# Altium PCB LTC6268-diff-iso.PcbDoc
Units mm, origin at the board's own origin, x right, y up, seen from the top; angles counter-clockwise.
Board outline 152.4 x 101.6 mm, 2 copper layers (Top Layer, Bottom Layer); 23 components, 16 nets, 59 pads, 0 vias.
Unrouted connection lines stored in the file: 37.
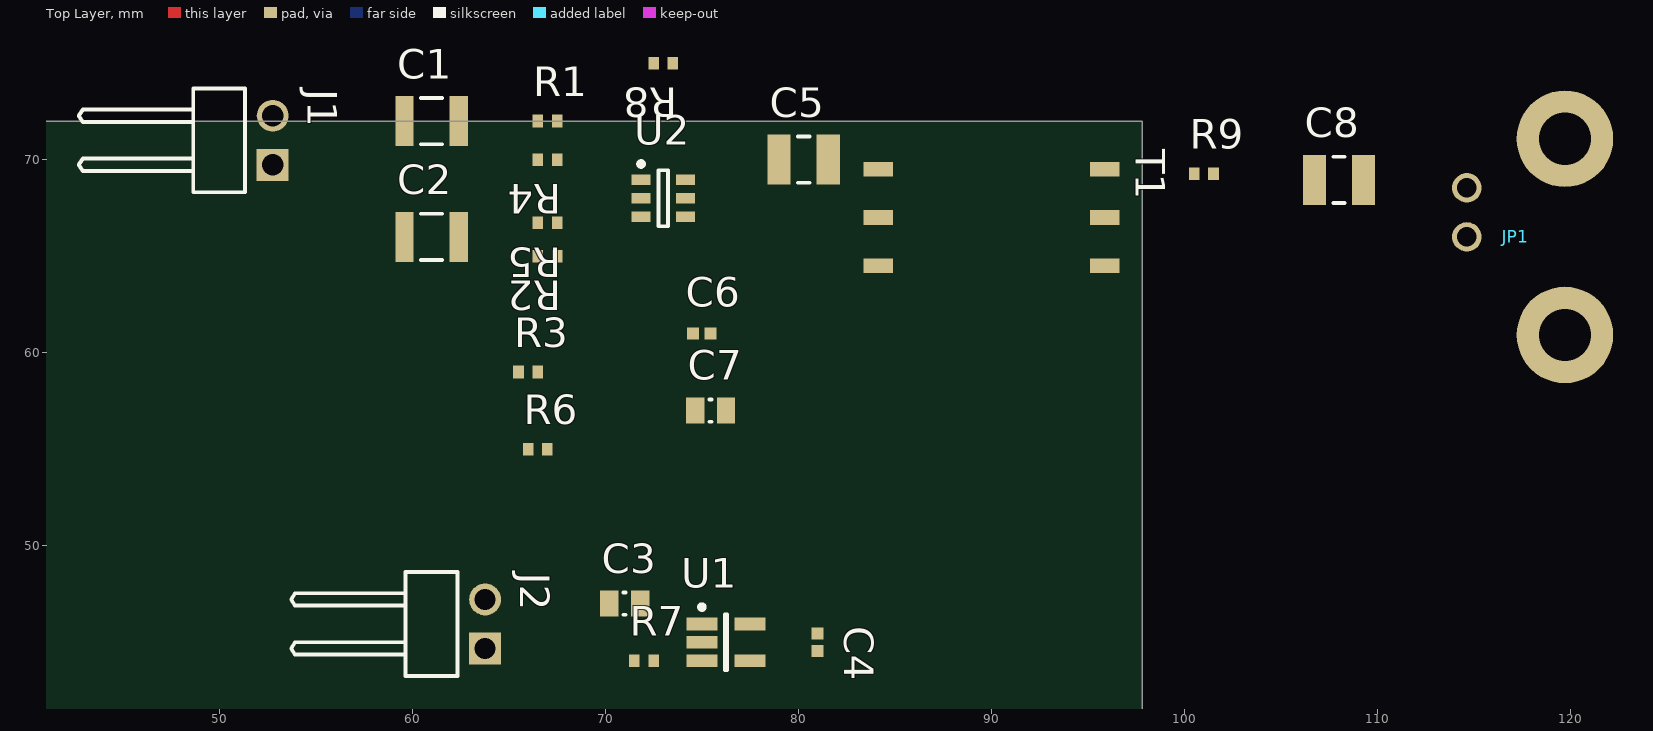
[diagram p0: Top Layer view]
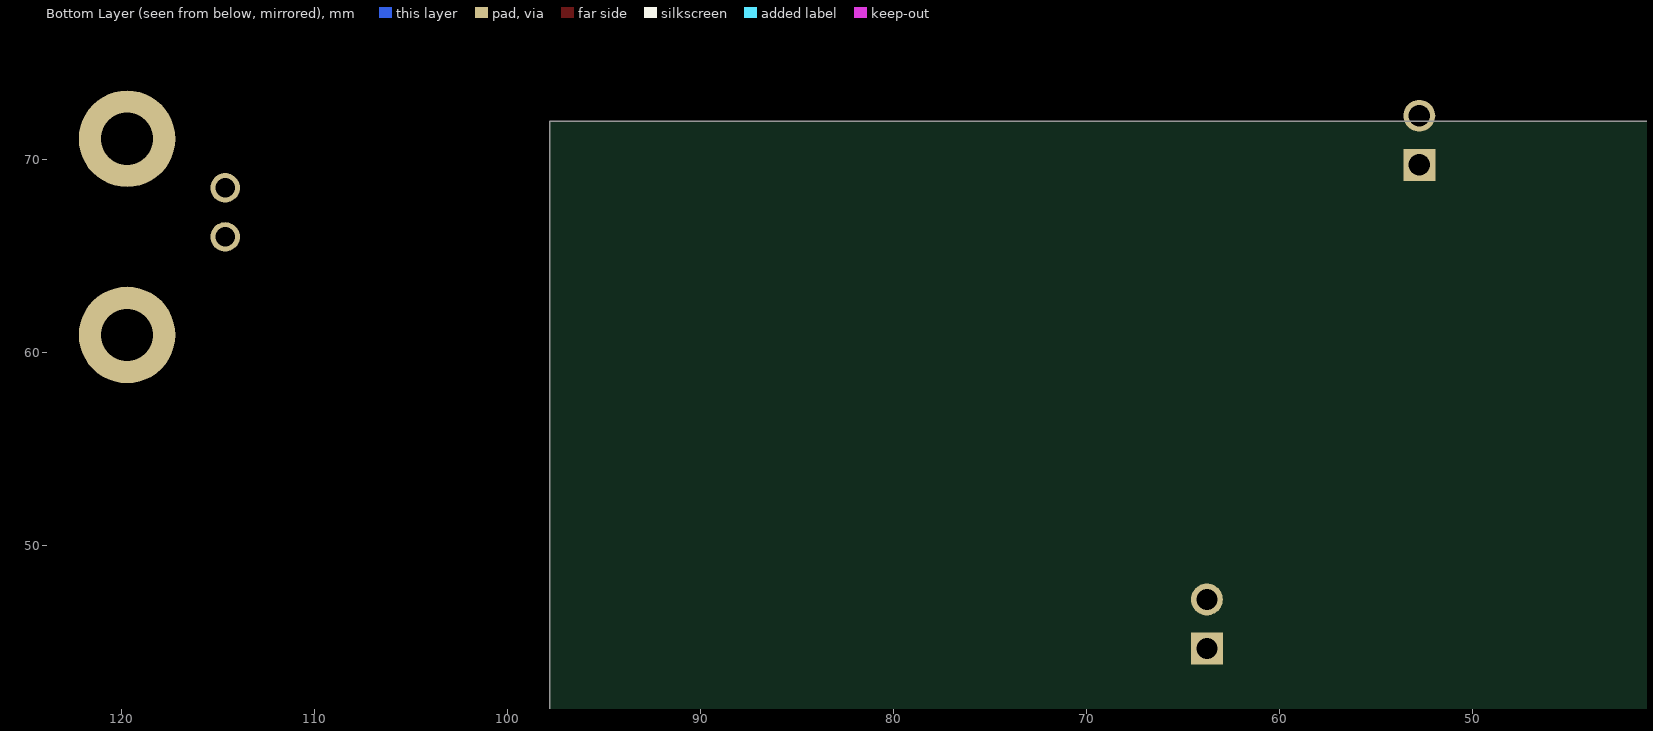
[diagram p1: Bottom Layer view, seen from below]

## Layer stack, top to bottom
Top Solder: solder mask 0.0102, Solder Resist, Dk 3.5
Top Layer: signal copper 0.0356
Dielectric 1: dielectric 0.32, FR-4, Dk 4.8
Bottom Layer: signal copper 0.0356
Bottom Solder: solder mask 0.0102, Solder Resist, Dk 3.5

## Board outline
-54.6,-29.6 97.8,-29.6 97.8,72 -54.6,72

## Design rules (kind name [scope] priority, off if disabled: settings)
Clearance [All] p1: gap=0.254 ignorepadtopadclearanceinfootprint=FALSE except(0: Arc-Hole Track-Hole SMDPad-Hole THPad-Hole Via-Hole Fill-Hole Poly-Hole Region-Hole Text-Hole)
PolygonConnect [All] p1: connectstyle=Relief reliefconductorwidth=0.254 reliefentries=4 polygonreliefangle="90 Angle" airgapwidth=0.254
RoutingVias [All] p1: holewidth=0.711 width=1.27 viastyle="Through Hole" minholewidth=0.711 minwidth=1.27 maxholewidth=0.711 maxwidth=1.27
SolderMaskExpansion [All] p1: expansion=0.102
Width [All] p1: maxlimit=0.254 minlimit=0.254 preferedwidth=0.254
30 further rules are at their usual default settings.

## Components (designator, comment, footprint, x,y, rotation, side; value= is the part's Value field where it differs from the comment)
C1 "CAP 2.2nF 630V 1210(3225)" CAPC1210(3225)170_L 61,72 r0 top value=2.2nF
C2 "CAP 2.2nF 630V 1210(3225)" CAPC1210(3225)170_L 61,66 r0 top value=2.2nF
C3 "CAP 1uF 16V 0805(2012)" CAPC0805(2012)145_L 71,47 r0 top value=1uF
C4 "CAP 10nF 16V 0402(1005)" CAPC0402(1005)33_N 81,45 r270 top value=10nF
C5 "FCA1210C105M-G2" CAPC1210(3225)135_L 80.275,70 r0 top value=1uF
C6 "CAP 10nF 16V 0402(1005)" CAPC0402(1005)33_N 75,61 r0 top value=10nF
C7 "CAP 1uF 16V 0805(2012)" CAPC0805(2012)145_L 75.45,57 r0 top value=1uF
C8 "FCA1210C105M-G2" CAPC1210(3225)135_L 108,68.95 r0 top value=1uF
J1 "61300211021" 61300211021 50,71 r270 top
J2 "61300211021" 61300211021 61,45.95 r270 top
JP1 "BNC" CONN-BNC-1-1337542-0 127,66 r0 top
R1 "49K9 1% 0402(1005)" RESC0402(1005)_N 67,72 r0 top value=49K9
R2 "49K9 1% 0402(1005)" RESC0402(1005)_N 67,65 r180 top value=49K9
R3 "549R 1% 0402(1005)" RESC0402(1005)_N 66,59 r0 top value=549R
R4 "549R 1% 0402(1005)" RESC0402(1005)_N 67,70 r180 top value=549R
R5 "10K 1% 0402(1005)" RESC0402(1005)_N 67,66.73 r180 top value=10K
R6 "10K 1% 0402(1005)" RESC0402(1005)_N 66.5,55 r0 top value=10K
R7 "48R7 1% 0402(1005)" RESC0402(1005)_N 72,44.05 r0 top value=48R7
R8 "4K99 1% 0402(1005)" RESC0402(1005)_N 73,75 r180 top value=4K99
R9 "48R7 1% 0402(1005)" RESC0402(1005)_N 101,69.27 r0 top value=48R7
T1 "SWB3010-SML_" Coilcraft-SWB 90,67 r0 top
U1 "LT1761ES5-5#PBF" LT-S5-5-TSOT-23_M 76.25,45 r0 top
U2 "LTC6268IS6" LT-S6-6-TSOT-23_L 73,68 r0 top

## Footprints (in the part's own frame and the unit in brackets; to place one, negate y for a bottom-side part, rotate by r counter-clockwise, add the part's x,y. Pads: shape width x height; smd on the part's side, far side on the other; paste and mask are expansions set on the pad)
61300211021 [mm] "Pin Header, pitch 2.54 mm, THT, Angled, single row, 2p"
  rect 1.65x1.65 hole 1.1: 1(1.27,2.77)
  round 1.65 hole 1.1: 2(-1.27,2.77)
  silkscreen extent -2.69,-7.27 2.69,1.35, body extent -2.54,-7.27 2.54,3.09, height 2.58
CAPC0402(1005)33_N [mm] "Chip Capacitor, Body 1.0x0.5mm, Height 0.33mm, IPC Medium Density"
  rect 0.62x0.62 smd: 1(-0.45,0) 2(0.45,0)
  body extent -0.55,-0.3 0.55,0.3, height 0.33
CAPC0805(2012)145_L [mm] "Chip Capacitor, Body 2.0x1.2mm, Height 1.45mm, IPC High Density"
  rect 0.95x1.35 smd: 1(-0.8,0) 2(0.8,0)
  silkscreen extent -0.05,-0.58 0.05,0.58, body extent -1.1,-0.72 1.1,0.72, height 1.45
CAPC1210(3225)135_L [mm] "Chip Capacitor, Body 3.2x2.5mm, Height 1.35mm, IPC High Density"
  rect 1.2x2.6 smd: 1(-1.275,0) 2(1.275,0)
  silkscreen extent -0.3,-1.2 0.3,1.2, body extent -1.7,-1.35 1.7,1.35, height 1.35
CAPC1210(3225)170_L [mm] "Chip Capacitor, Body 3.2x2.5mm, Height 1.7mm, IPC High Density"
  rect 0.95x2.6 smd: 1(-1.4,0) 2(1.4,0)
  silkscreen extent -0.55,-1.2 0.55,1.2, body extent -1.7,-1.35 1.7,1.35, height 1.7
Coilcraft-SWB [mm] "SWB Wideband RF Transformers"
  rect 1.52x0.76 smd: 1(-5.86,2.5) 2(-5.86,0) 3(-5.86,-2.5) 4(5.86,-2.5) 5(5.86,0) 6(5.86,2.5)
  body extent -6.6,-3.84 6.6,3.78, height 5.76
CONN-BNC-1-1337542-0 [mm]
  round 5 hole 2.7: 0(-7.3,-5.08) 0(-7.3,5.08)
  round 1.524 hole 1: 1(-12.38,0) 2(-12.38,2.54)
  body extent -14.4,-7.35 21.1,7.35, height 13.31
LT-S5-5-TSOT-23_M [mm] "SOT23, 5-Leads, Body 2.90x1.63mm, Pitch 0.95mm, IPC Low Density"
  rect 1.6x0.65 smd: 1(-1.25,0.95) 2(-1.25,0) 3(-1.25,-0.95) 4(1.25,-0.95) 5(1.25,0.95)
  silkscreen extent -1.37,-1.45 0.05,1.95, body extent -0.87,-1.45 0.87,1.45, height 1
LT-S6-6-TSOT-23_L [mm] "SOT23, 6-Leads, Body 2.90x1.63mm, Pitch 0.95mm, IPC High Density"
  rect 1x0.55 smd: 1(-1.15,0.95) 2(-1.15,0) 3(-1.15,-0.95) 4(1.15,-0.95) 5(1.15,0) 6(1.15,0.95)
  silkscreen extent -1.27,-1.45 0.25,1.9, body extent -1.42,-1.5 1.42,1.5, height 1.2
RESC0402(1005)_N [mm] "Chip Resistor, Body 1.0x0.5mm, IPC Medium Density"
  rect 0.55x0.65 smd: 1(-0.5,0) 2(0.5,0)
  body extent -0.52,-0.27 0.53,0.28, height 0.4

## Part data
C1 C2: library part CMP-1038-00746-1, "CAP 2.2nF 630V ±5% 1210 (3225 Metric) Thickness 1.7mm SMD", Case-EIA=1210, Case-Metric=3225, MPN=C1210C222JDGACTU, Rated Voltage="630 V", Tolerance=±5%, DigiKey=399-11204-6-ND, Max Thickness="1.7 mm", Technology=SMT
C3 C7: library part CMP-1036-04746-1, "CAP 1uF 16V ±10% 0805 (2012 Metric) Thickness 1.45mm SMD", Case-EIA=0805, Case-Metric=2012, Rated Voltage="16 V", Tolerance=±10%, Max Thickness="1.45 mm", Technology=SMT
C4 C6: library part CMP-1034-01875-1, "CAP 10nF 16V ±10% 0402 (1005 Metric) Thickness 0.33mm SMD", Case-EIA=0402, Case-Metric=1005, Rated Voltage="16 V", Tolerance=±10%, Max Thickness="0.33 mm", Technology=SMT
C5 C8: library part CAP_1210_1UF16V_FCA, "CAP FILM 1UF 20% 16VDC 1210", Voltage=16V, DigiKey=338-2778-2-ND, Farnell=2112915, MPN=FCA1210C105M-G2, PackageReference=1210
J1 J2: "THT Angled Pin Header WR-PHD, Pitch 2.54 mm, Single Row, 2 pins", Contact Resistance="20 mOhm", Operating Temperature="-40 to 105 degC", Rated Current="3 A", Withstanding Voltage="500 VAC", Working Voltage="250 VAC", ComponentLink1Description=Manufacturer, ComponentLink1URL=http://www.we-online.de, ComponentLink2Description=Datasheet, ComponentLink2URL=https://katalog.we-online.de/em/datasheet/6130xx11021.pdf, Gender=Male, Mounting Technology=THT, Orientation=Angled, Packaging=Bag, Part Number=61300211021, Pin Number=2, Pitch="2.54 mm", Published Date="August 2018", Publisher="Wurth Elektronik", Row Number=Single
JP1: library part CONN-BNC-1-1337542-0, "BNC Connector Jack, Female Socket 50 Ohm Panel Mount, Through Hole, Right Angle Solder", MPN=1-1337542-0
R1 R2: library part CMP-1011-00702-1, "49K9 0.063W 1% 0402 (1005 Metric)  SMD", Case-EIA=0402, Case-Metric=1005, Power="0.063 W", Tolerance="1 %", Technology=SMT
R3 R4: library part CMP-1011-00481-1, "549R 0.063W 1% 0402 (1005 Metric)  SMD", Case-EIA=0402, Case-Metric=1005, Power="0.063 W", Tolerance="1 %", Technology=SMT
R5 R6: library part CMP-1011-00623-1, "10K 0.063W 1% 0402 (1005 Metric)  SMD", Case-EIA=0402, Case-Metric=1005, Power="0.063 W", Tolerance="1 %", Technology=SMT
R7 R9: library part CMP-1011-00362-1, "48R7 0.063W 1% 0402 (1005 Metric)  SMD", Case-EIA=0402, Case-Metric=1005, Power="0.063 W", Tolerance="1 %", Technology=SMT
R8: library part CMP-1011-00589-1, "4K99 0.063W 1% 0402 (1005 Metric)  SMD", Case-EIA=0402, Case-Metric=1005, Power="0.063 W", Tolerance="1 %", Technology=SMT
T1: library part TRANS-SWB3010-SML_, "Wideband RF Transformers – SWB", MPN=SWB3010-SML_
U1: library part CMP-0476-01256-1, "100 mA, Low Noise, LDO Micropower Regulator, 1.8 to 20 V Vin, 5 V Vout, 5-pin SOT23 (S5-5), -40 to 125 degC, Pb-Free", Dropout Voltage(V)=0.3, Manufacturer="Linear Technology", Output Voltage="5 V", Shutdown Current(uA)=1, Code_JEDEC=MO-193, ComponentLink1Description="Manufacturer URL", ComponentLink1URL=http://www.linear.com/, ComponentLink2Description=Datasheet, ComponentLink2URL=http://cds.linear.com/docs/en/datasheet/1761sff.pdf, ComponentLink3Description="Package Specification", ComponentLink3URL=http://cds.linear.com/docs/en/packaging/SOT_5_05-08-1635.pdf, DatasheetVersion="Rev. F", Discrete Pass Element=no, Iout(mA)=100, Isupply(mA)=0.02, Mounting Technology="Surface Mount", Noise(uV)=20, Number of Outputs=1, PackageDescription="5-Pin Plastic TSOT-23, Body 1.63 x 2.90 mm, Pitch 0.95 mm", PackageReference=S5-5, PackageVersion=Jun-10, PartNumber=LT1761ES5-5#PBF, PSRR(dB)=65, RoHS=TRUE, Vin Max(V)=20, Vin Min(V)=1.8
U2: library part IC-LINEAR-LTC6268IS6#TRMPBF, "IC OPAMP 500MHZ SGL FET TSOT23-6", MPN=LTC6268IS6#TRMPBF, DigiKey=LTC6268IS6#TRMPBFCT-ND, Farnell=2464181

## Nets (pads, with @x,y where several pads share a name; then routed paths per layer and width w, separated by ;. In a path a pad name is that pad's centre, name@x,y a point inside that pad or via, vN(x,y) a via of type N, cw(c..) or ccw(c..) an arc to the next point about the centre after c; other vN are vias at no path point)
5VA: C4.1 C6.1 C7.2 R5.2 U1.5 U2.5 U2.6
GND: C3.1 C6.2 C7.1 J2.2 R3.1 R4.2 R6.1 T1.3 U1.2 U2.2
NetC1_1: C1.1 J1.1
NetC1_2: C1.2 R1.1
NetC2_1: C2.1 J1.2
NetC2_2: C2.2 R2.2
NetC3_2: C3.2 R7.2 U1.1 U1.3
NetC4_2: C4.2 U1.4
NetC5_1: C5.1 R8.1 U2.1
NetC5_2: C5.2 T1.1
NetC8_1: C8.1 R9.2
NetC8_2: C8.2 JP1.1
NetJP1_2: JP1.2 T1.4
NetR1_2: R1.2 R4.1 R8.2 U2.4
NetR2_1: R2.1 R3.2 R5.1 R6.2 U2.3
NetR9_1: R9.1 T1.6
pads on no net: J2.1 JP1.0 R7.1 T1.2 T1.5

## Silkscreen, mask and mechanical layers (free items; w line width, h text height)
Mechanical 1:
  lines w0.254: 0,-30.39 0,30.39 ; 3.102,56.636 cw(c52.28,-297.314) 79.997,58.959 ; 78.18,-33.5 78.18,33.5